# Altium PCB flowhw.PcbDoc (part 2 of 2)
Units mil, origin at the board's own origin, x right, y up, seen from the top; angles counter-clockwise.
Board outline 4650 x 1950 mil, 4 copper layers (Top Layer, Layer 1, Layer 2, Bottom Layer), stack 23.756 mil thick; 120 components, 77 nets, 417 pads, 937 vias.
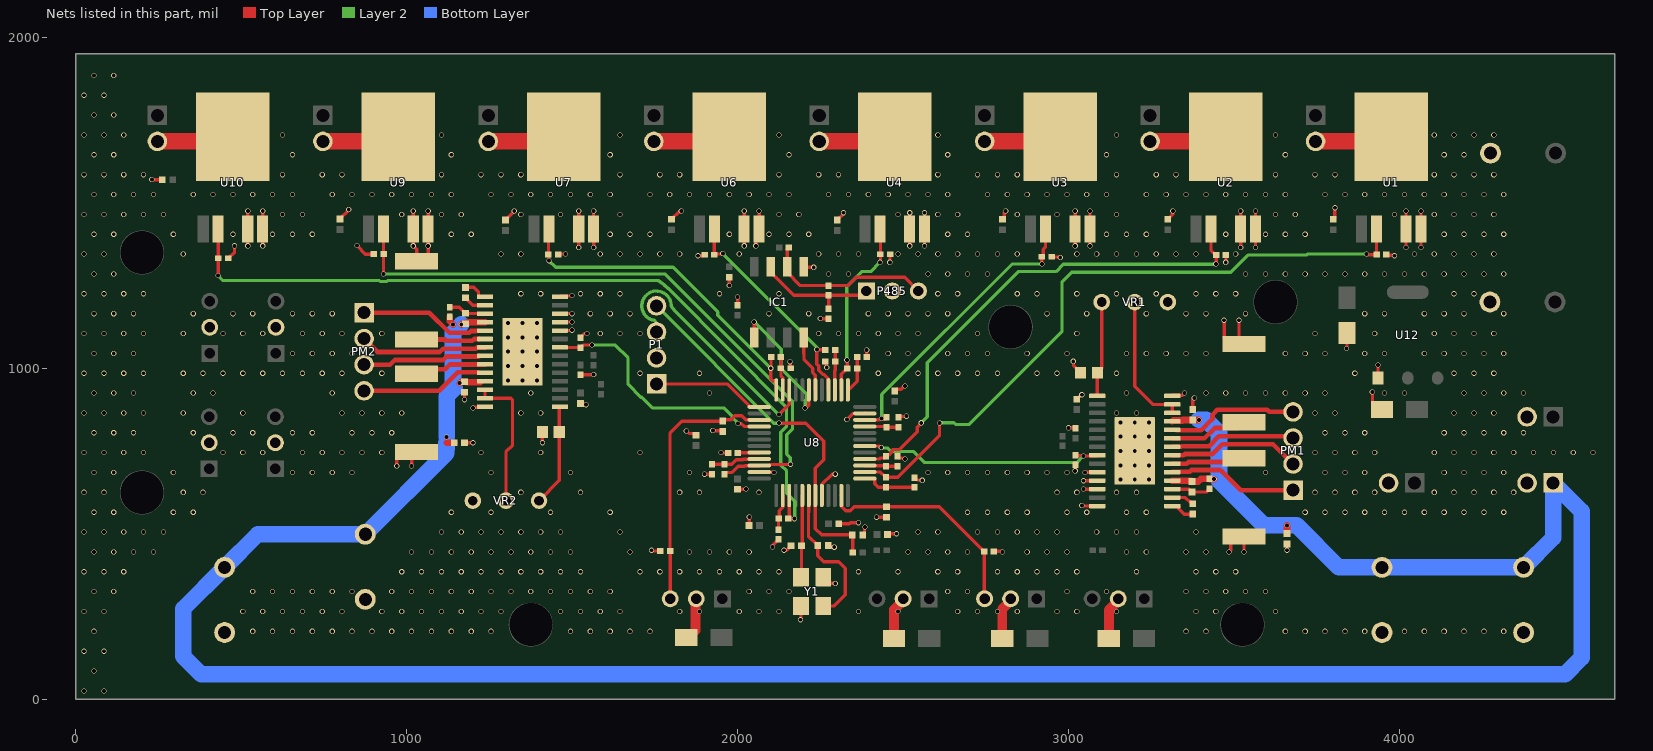
[diagram p4: the nets of this part, all layers, seen from the top]

## Via types
v1: diameter 15.75, hole 11.81, Top Layer to Bottom Layer, tented both sides, 907 vias
v2: diameter 19.68, hole 11.81, Top Layer to Bottom Layer, tented both sides, 30 vias

## Nets (pads, with @x,y where several pads share a name; then routed paths per layer and width w, separated by ;. In a path a pad name is that pad's centre, name@x,y a point inside that pad or via, vN(x,y) a via of type N, cw(c..) or ccw(c..) an arc to the next point about the centre after c; other vN are vias at no path point) (continued)
GND: 5V.2 12V.2 C1.1 C2.2 C3.2 C4.1 C5.1 C6.2 C7.1 C8.2 C9.2 C10.2 C12.1 C13.1 C15.2 C16.1 C17.1 C18.2 C19.2 C20.1 C21.2 C22.2 C23.1 C24.2 C25.2 C26.2 C27.1 C28.2 C29.2 C30.2 C31.1 C33.1 C35.2 C36.2 C37.2 C38.2 C39.1 C40.1 C41.1 C42.1 C43.1 C44.1 IC1.5 P1.2 P485.2 pad.2@403.35,775 pad.2@405,1123.74 pad.2@603.35,775 pad.2@605,1123.74 pad.2@1875,303.35 pad.2@2500,303.35 pad.2@2825,303.35 pad.2@3150,303.35 pad.14 pad.24 pad.25 pad.26 pad.28 pad.29 R1.1 R2.2 R5.1 R7.1 R8.2 R11.2 R14.2 R15.2 R17.1 R18.1 R19.2 R20.2 R22.2 R24.2 R25.2 R26.2 R27.2 R28.2 R29.2 R30.2 R31.2 R40.2 R41.2 R42.2 R43.2 R44.2 R45.2 R46.2 R47.2 U1.4 U1.5 U2.4 U2.5 U3.4 U3.5 U4.4 U4.5 U6.4 U6.5 U7.4 U7.5 U8.8 U8.23 U8.47 U9.4 U9.5 U10.4 U10.5 U12.1 VM.2 VR1.1 VR2.1 Y1.2 Y1.4 | length 5240.3
  Top Layer w10: v1(230,1570) 230.09,1569.91 C27.1@261.76,1569.91 ; R31.2@460.53,1332.39 461.51,1332.39 480,1350.88 v1(480,1370) ; v1(520,1370) 519.88,1370.12 U10.4@519.88,1420.47 519.88,1474.88 v1(520,1475) ; v1(565,1370) 564.76,1370.24 U10.5@564.76,1420.47 564.76,1474.76 v1(565,1475) ; C23.1@798.32,1451.02 825,1477.69 v1(825,1480) ; v1(850,1370.75) 850,1370 875.24,1344.76 R30.2@900.72,1344.76 ; v1(970,705) v1(970,705) 970.04,727.28 989.65,746.89 R22.2@1030,746.89 1015,731.89 v1(1015,705) ; v1(1020,1475) 1020,1420.59 U9.4@1019.88,1420.47 1020,1420.35 v1(1020,1370) 1030,1360 R19.2@1030,1323.11 1045.39,1323.11 1065,1342.72 v1(1065,1370) 1064.76,1370.24 U9.5@1064.76,1420.47 1065,1420.71 v1(1065,1475) ; C39.1@1174.6,927.68 1174.6,905.4 v1(1175,905) ; C40.1@1175,775 v1(1200,775) ; v1(1200,880) 1201.77,881.77 1234.92,881.77 pad.14@1236.81,883.66 ; C20.1@1298.3,1447.63 1325,1474.33 v1(1325,1475) ; C33.1@1409.93,807.08 1410,807.01 v1(1410,775) ; R29.2@1457.92,1343.21 1459.71,1345 v1(1480,1345) ; pad.24@1463.19,1113.98 1498.98,1113.98 v1(1500,1115) ; pad.25@1463.19,1139.57 1499.57,1139.57 v1(1500,1140) ; pad.26@1463.19,1165.16 1499.84,1165.16 v1(1500,1165) ; pad.28@1463.19,1216.34 1465.08,1218.23 1498.23,1218.23 v1(1500,1220) ; v1(1520,1365) 1520,1420.35 U7.4@1519.88,1420.47 1520,1420.59 v1(1520,1475) ; C29.2@1525,893.5 1527.4,891.1 1541.03,891.1 v1(1542.13,890) ; R18.1@1525,980.32 1562.26,980.32 1563.44,981.5 v1(1565,981.5) ; R17.1@1525,1091.73 1525,1092.72 1537.28,1105 v1(1545,1105) ; v1(1565,1365) 1565,1420.24 U7.5@1564.76,1420.47 1564.76,1474.76 v1(1565,1475) ; v1(1740,450) 1742.14,447.86 R14.2@1766.43,447.86 ; C12.1@1800,1450 1825,1475 v1(1830,1475) ; C22.2@1844.63,186.85 1852.5,186.85 C22.2@1873.09,207.44 ; v1(1845,810.32) 1846.56,810.32 1853.8,803.08 1868.79,803.08 C9.2@1874.03,797.84 ; pad.2@1873.09,301.44 pad.2@1875,303.35 ; v1(1880,1340) 1896.88,1340 R28.2@1899.98,1343.1 ; v1(1900,680) 1922.87,680 R46.2@1923.12,680.25 ; v1(1925.07,812.28) 1926.17,811.18 1953.07,811.18 C24.2@1955,809.25 ; v1(1950,745) 1950.8,744.2 1970.37,744.2 R20.2@1971.18,743.39 ; v1(1975,1250) C6.2@1975,1275 ; C43.1@2000,634.25 2024.25,634.25 v1(2025,635) ; R2.2@2000,1189.76 v1(2000,1215) ; v1(2020,1370) 2019.88,1370.12 U6.4@2019.88,1420.47 2020,1420.59 v1(2020,1475) ; C41.1@2034.25,525 2034.78,525.53 2034.78,549.78 v1(2035.32,550.32) ; v1(2055,1370) 2055,1410.71 2065,1420.71 v1(2065,1475) ; U8.47@2065.55,686.42 2065.9,686.07 2109.2,686.07 v1(2110.12,685.15) ; v1(2105,460) 2105,463.53 2123.11,481.64 R47.2@2123.11,482.62 ; v1(2140,450) 2147.92,450 C31.1@2161.57,463.65 ; v1(2158.36,1019.94) 2159.38,1018.93 2159.38,1000.85 R45.2@2160.39,999.83 ; v1(2190,240) 2191.54,241.54 Y1.4@2191.54,281.69 ; IC1.5@2200,1306.77 2201.77,1305 v1(2230,1305) ; v1(2250,1150) R1.1@2275,1150 ; U8.8@2254.53,615.55 2254.87,615.9 2254.87,649.65 2285.23,680 v1(2295,680) ; Y1.2@2258.46,368.31 2276.77,350 v1(2295,350) ; R44.2@2265.24,1020 2265.24,1019.15 2268.24,1016.14 2268.24,1003.48 v1(2269.34,1002.38) ; C30.2@2273.57,464.47 2277.59,460.45 2290.87,460.45 v1(2291.97,459.35) ; C7.1@2300.9,1448.07 2320,1467.16 v1(2320,1470) ; C42.1@2310.98,530 2337.85,530 2340.97,533.12 2365.31,533.12 v1(2365.64,533.45) ; v1(2330,845) 2348.24,863.24 2384.1,863.24 U8.23@2384.45,863.58 ; C28.2@2378.01,496.47 2383.24,501.7 2383.24,516.69 2385,518.44 v1(2385,520) ; v1(2390,1055) 2390.3,1054.7 2390.3,1034.71 R43.2@2390.6,1034.41 ; v1(2420,550) C26.2@2450,550 ; C21.2@2452.91,497.52 2455.4,500 v1(2480,500) ; v1(2460,1320) 2460.61,1320.61 2460.61,1343.92 R27.2@2461.23,1344.53 ; C44.1@2475,931.5 2480.24,936.73 2493.74,936.73 2503.79,946.78 v1(2505.35,946.78) ; R41.2@2483.65,733.72 2483.65,732.74 2487.51,728.88 2501.33,728.88 2504.41,725.8 v1(2505.96,725.8) ; R42.2@2485.8,851.47 2488.45,854.12 2508.93,854.12 v1(2510.03,855.22) ; v1(2520,1370) 2520,1385.12 2531.61,1385.12 2519.88,1396.85 U4.4@2519.88,1420.47 2520,1420.59 v1(2520,1470) ; R40.2@2535,669.76 2535,668.78 2538.86,664.92 2540.08,664.92 2542.64,662.36 2556.71,662.36 v1(2557.81,661.26) ; v1(2565,1370) 2564.76,1370.24 U4.5@2564.76,1420.47 2565,1420.71 v1(2565,1470) ; R15.2@2774.11,446.78 2798.22,446.78 v1(2800,445) ; C5.1@2800,1450 2805.24,1455.24 2805.24,1470.24 v1(2810,1475) ; R26.2@2948.58,1336.87 2949.52,1335.93 2974.07,1335.93 v1(2975,1335) ; v1(3000,820) 3018.81,820 R7.1@3020.82,817.99 ; v1(3014.11,1020.89) 3015.21,1019.79 3015.21,1007.77 3035.69,987.3 C13.1@3035.69,986.31 ; v1(3020,690) 3020,707.45 R5.1@3020.82,708.27 ; v1(3020,1370) 3019.88,1370.12 U3.4@3019.88,1420.47 3020,1420.59 v1(3020,1475) ; C8.2@3025,906.5 3038.5,920 v1(3040,920) ; v1(3040,585) 3041.34,583.66 pad.28@3086.81,583.66 ; v1(3045,635) 3045.16,634.84 pad.26@3086.81,634.84 ; v1(3045,660) 3045.43,660.43 pad.25@3086.81,660.43 ; v1(3050,685) 3050.51,685.51 3086.3,685.51 pad.24@3086.81,686.02 ; v1(3065,1370) 3065,1420.24 U3.5@3064.76,1420.47 3064.76,1474.76 v1(3065,1475) ; C4.1@3300,1450 3315,1465 v1(3315,1475) ; pad.14@3313.19,916.34 3315.08,918.23 3343.23,918.23 v1(3350,925) ; C16.1@3375,875 3375,905 v1(3380,910) ; v1(3470,1145) v1(3470,1145) 3470.04,1092.72 3489.65,1073.11 R11.2@3530,1073.11 3515,1088.11 v1(3515,1145) ; v1(3475,1320) 3475.45,1320.45 R25.2@3475.45,1341.75 ; v1(3485,445) 3490,450 3490,472.28 3509.61,491.89 R8.2@3530,491.89 v1(3530,445) ; v1(3520,1365) 3520,1420.35 U2.4@3519.88,1420.47 3520,1420.59 v1(3520,1475) ; v1(3565,1365) 3565,1420.24 U2.5@3564.76,1420.47 3564.76,1474.76 v1(3565,1475) ; v1(3660,450) C17.1@3660,469.25 ; C1.1@3800,1450 3803.9,1453.9 3803.9,1483.9 v1(3805,1485) ; v1(3840,1060) 3841.61,1061.61 C38.2@3841.61,1106.81 ; v1(3917.82,927.82) 3918.39,927.25 3918.39,895.59 3938.98,875 C37.2@3946.85,875 ; U12.1@3934.84,970.28 3934.84,1009.84 v1(3935,1010) ; R24.2@3960.22,1343.23 3962.35,1341.1 3983.9,1341.1 v1(3985,1340) ; v1(4020,1365) 4019.88,1365.12 U1.4@4019.88,1420.47 4019.88,1474.88 v1(4020,1475) ; v1(4065,1365) 4065,1420.24 U1.5@4064.76,1420.47 4064.76,1474.76 v1(4065,1475)
  Top Layer w30: C22.2@1873.09,207.44 pad.2@1873.09,301.44 ; C15.2@2472.82,183.64 2472.82,270.43 2500,297.61 pad.2@2500,303.35 ; C25.2@2799.64,182.83 2799.64,272.26 2825,297.61 pad.2@2825,303.35 ; C10.2@3121.62,182.77 3121.62,269.24 3150,297.61 pad.2@3150,303.35
  other v1: 25,25 85,25 55,85 25,145 85,145 55,205 535,205 595,205 655,205 715,205 775,205 835,205 895,205 955,205 1015,205 1075,205 1135,205 1195,205 1255,205 1495,205 1555,205 1615,205 1675,205 1735,205 3355,205 3415,205 3655,205 3715,205 3775,205 3835,205 3895,205 4015,205 4075,205 4135,205 4195,205 4255,205 4315,205 25,265 85,265 505,265 565,265 625,265 685,265 745,265 805,265 925,265 985,265 1045,265 1105,265 1165,265 1225,265 1285,265 1465,265 1525,265 1585,265 1645,265 1825,265 1885,265 2005,265 2065,265 2125,265 2365,265 2485,265 2665,265 2725,265 2785,265 2845,265 2965,265 3025,265 3145,265 3385,265 3445,265 3625,265 55,325 115,325 535,325 595,325 655,325 715,325 775,325 835,325 955,325 1015,325 1075,325 1135,325 1195,325 1255,325 1315,325 1375,325 1435,325 1495,325 1555,325 1615,325 2035,325 2095,325 2155,325 2635,325 2695,325 2995,325 3115,325 3355,325 3415,325 3475,325 3535,325 3595,325 25,385 85,385 145,385 985,385 1045,385 1105,385 1165,385 1225,385 1285,385 1345,385 1405,385 1465,385 1525,385 1705,385 1765,385 1825,385 1885,385 1945,385 2005,385 2065,385 2125,385 2365,385 2485,385 2605,385 2665,385 2785,385 2845,385 2905,385 2965,385 3025,385 3205,385 3385,385 3445,385 3505,385 55,445 115,445 175,445 235,445 1015,445 1075,445 1135,445 1195,445 1255,445 1315,445 1375,445 1435,445 1495,445 1675,445 1855,445 1915,445 1975,445 2035,445 2515,445 2575,445 2635,445 2695,445 2875,445 2935,445 2995,445 3175,445 3235,445 3355,445 3415,445 25,505 85,505 145,505 205,505 265,505 1105,505 1165,505 1225,505 1285,505 1345,505 1405,505 1465,505 1645,505 2545,505 2605,505 2725,505 2785,505 2845,505 2905,505 2965,505 3085,505 3145,505 3205,505 3385,505 55,565 115,565 295,565 355,565 1135,565 1255,565 1435,565 1615,565 2695,565 2755,565 2815,565 2875,565 2995,565 3055,565 3175,565 3235,565 3715,565 3775,565 3835,565 3895,565 3955,565 4015,565 4075,565 4135,565 4195,565 4255,565 4315,565 25,625 85,625 325,625 385,625 1345,625 1525,625 1825,625 1885,625 2065,625 2965,625 3025,625 3145,625 3205,625 3745,625 3805,625 3865,625 3925,625 4105,625 4165,625 4225,625 4285,625 4345,625 55,685 115,685 295,685 655,685 715,685 775,685 835,685 1255,685 1495,685 1855,685 2575,685 2635,685 2695,685 2755,685 2815,685 2875,685 2935,685 2995,685 3595,685 3775,685 3835,685 3895,685 4135,685 4195,685 4255,685 4315,685 25,745 85,745 145,745 205,745 445,745 505,745 565,745 685,745 745,745 805,745 865,745 925,745 1225,745 1405,745 1705,745 3745,745 3805,745 3865,745 3925,745 4105,745 4165,745 4225,745 4285,745 4345,745 4405,745 4465,745 4525,745 4585,745 55,805 115,805 175,805 355,805 475,805 535,805 655,805 715,805 835,805 895,805 955,805 3775,805 3835,805 3895,805 4135,805 4195,805 4255,805 4315,805 4375,805 25,865 85,865 145,865 205,865 325,865 505,865 805,865 865,865 925,865 985,865 1345,865 1405,865 3145,865 3205,865 3745,865 3805,865 4165,865 4225,865 4285,865 55,925 115,925 175,925 355,925 415,925 775,925 1375,925 1915,925 3175,925 3415,925 3475,925 3535,925 3595,925 3655,925 3715,925 3775,925 3955,925 4015,925 4195,925 4255,925 4315,925 4375,925 25,985 85,985 145,985 205,985 325,985 385,985 445,985 505,985 565,985 625,985 685,985 745,985 805,985 925,985 1705,985 1885,985 2425,985 2545,985 2605,985 2665,985 2725,985 2785,985 2905,985 2965,985 3145,985 3865,985 4165,985 4225,985 4285,985 55,1045 115,1045 175,1045 655,1045 715,1045 775,1045 835,1045 2455,1045 2515,1045 2635,1045 2695,1045 2755,1045 2875,1045 2995,1045 3175,1045 3235,1045 3295,1045 3355,1045 3415,1045 3655,1045 3715,1045 3775,1045 3895,1045 3955,1045 4075,1045 4135,1045 4195,1045 4255,1045 4315,1045 25,1105 85,1105 145,1105 205,1105 325,1105 445,1105 505,1105 565,1105 685,1105 745,1105 805,1105 925,1105 1585,1105 1645,1105 1705,1105 2245,1105 2305,1105 2365,1105 2425,1105 2485,1105 2545,1105 2725,1105 3025,1105 3745,1105 3925,1105 4105,1105 4165,1105 4225,1105 4285,1105 55,1165 115,1165 175,1165 355,1165 475,1165 535,1165 655,1165 715,1165 775,1165 1555,1165 1615,1165 1675,1165 2095,1165 2215,1165 2395,1165 2455,1165 2515,1165 2575,1165 2635,1165 2935,1165 3055,1165 3235,1165 3355,1165 3415,1165 3535,1165 3895,1165 3955,1165 4075,1165 4135,1165 4195,1165 4315,1165 25,1225 85,1225 145,1225 205,1225 1345,1225 1405,1225 1525,1225 1585,1225 1645,1225 1945,1225 2125,1225 2605,1225 2665,1225 2845,1225 2905,1225 3025,1225 3145,1225 3265,1225 3385,1225 3445,1225 3505,1225 4165,1225 4225,1225 55,1285 115,1285 2275,1285 2335,1285 2575,1285 2635,1285 2695,1285 2755,1285 3535,1285 3595,1285 3655,1285 3715,1285 3775,1285 3835,1285 3895,1285 3955,1285 4015,1285 4075,1285 4135,1285 4195,1285 4255,1285 4315,1285 25,1345 85,1345 325,1345 1285,1345 1345,1345 1585,1345 1645,1345 1705,1345 1765,1345 1825,1345 2005,1345 2245,1345 2305,1345 2365,1345 2485,1345 2545,1345 2605,1345 2665,1345 2725,1345 2785,1345 2845,1345 3025,1345 3085,1345 3145,1345 3205,1345 3265,1345 3325,1345 3385,1345 3505,1345 4045,1345 4105,1345 4165,1345 4225,1345 4285,1345 55,1405 115,1405 295,1405 475,1405 595,1405 655,1405 715,1405 1135,1405 1195,1405 1615,1405 1675,1405 1735,1405 1975,1405 2095,1405 2155,1405 2215,1405 2635,1405 2695,1405 3115,1405 3175,1405 3235,1405 3475,1405 3595,1405 3655,1405 3715,1405 4135,1405 4195,1405 4255,1405 4315,1405 25,1465 85,1465 145,1465 205,1465 265,1465 625,1465 685,1465 985,1465 1105,1465 1165,1465 1345,1465 1465,1465 1645,1465 2125,1465 2185,1465 2485,1465 2605,1465 2665,1465 2845,1465 2965,1465 3145,1465 3625,1465 3685,1465 3985,1465 4105,1465 4165,1465 4225,1465 4285,1465 55,1525 115,1525 175,1525 235,1525 355,1525 415,1525 475,1525 535,1525 595,1525 655,1525 775,1525 835,1525 895,1525 955,1525 1015,1525 1075,1525 1135,1525 1255,1525 1315,1525 1375,1525 1435,1525 1495,1525 1555,1525 1615,1525 1735,1525 1795,1525 1855,1525 1915,1525 1975,1525 2035,1525 2095,1525 2155,1525 2275,1525 2335,1525 2395,1525 2455,1525 2515,1525 2575,1525 2635,1525 2755,1525 2815,1525 2875,1525 2935,1525 2995,1525 3055,1525 3115,1525 3235,1525 3295,1525 3355,1525 3415,1525 3475,1525 3535,1525 3595,1525 3655,1525 3775,1525 3835,1525 3895,1525 3955,1525 4015,1525 4075,1525 4135,1525 4195,1525 4255,1525 4315,1525 25,1585 85,1585 145,1585 205,1585 625,1585 745,1585 805,1585 1105,1585 1225,1585 1285,1585 1345,1585 1645,1585 1765,1585 1825,1585 2125,1585 2245,1585 2305,1585 2605,1585 2725,1585 2785,1585 2845,1585 3145,1585 3265,1585 3325,1585 3625,1585 3745,1585 3805,1585 4105,1585 4165,1585 4225,1585 4285,1585 55,1645 115,1645 655,1645 1135,1645 1615,1645 2155,1645 2635,1645 3115,1645 3655,1645 4135,1645 4195,1645 25,1705 85,1705 145,1705 625,1705 1105,1705 1645,1705 2125,1705 2605,1705 3145,1705 3625,1705 4105,1705 4165,1705 4225,1705 4285,1705 55,1765 115,1765 25,1825 85,1825 55,1885 115,1885
  other v2: 3156.69,663.39 3200,663.39 3243.31,663.39 3156.69,706.69 3200,706.69 3243.31,706.69 3156.69,750 3200,750 3243.31,750 3156.69,793.31 3200,793.31 3243.31,793.31 3156.69,836.61 3200,836.61 3243.31,836.61 1306.69,963.39 1350,963.39 1393.31,963.39 1306.69,1006.69 1350,1006.69 1393.31,1006.69 1306.69,1050 1350,1050 1393.31,1050 1306.69,1093.31 1350,1093.31 1393.31,1093.31 1306.69,1136.61 1350,1136.61 1393.31,1136.61
LIM1: C24.1 pad.3@1796.26,303.35 R14.1 U8.39 | length 797.3
  Top Layer w10: pad.3@1796.26,303.35 1796.11,303.5 1796.11,447.7 R14.1@1795.95,447.86 1795.95,804.54 1830.86,839.45 1955,839.45 1960.24,844.7 1980.24,844.7 1991.62,856.08 2012.9,856.08 2024.74,844.24 2065.2,844.24 U8.39@2065.55,843.9
LIM2: C26.1 pad.3@2746.26,303.35 R15.1 U8.11 | length 675.1
  Top Layer w10: U8.11@2313.58,615.55 2313.93,615.2 2313.93,581.45 2326.27,569.12 2340.27,569.12 2352.65,581.5 C26.1@2450,581.5 2608.89,581.5 2743.6,446.78 R15.1@2744.58,446.78 2745.42,445.95 2745.42,304.19 pad.3@2746.26,303.35
NetC11_1: C11.1 pad.2@3313.19,609.25 | length 69.5
  Top Layer w10: pad.2@3313.19,609.25 3352.8,609.25 3366.06,595.98 3369.76,595.98 C11.1@3375,590.75
NetC11_2: C11.2 pad.1@3313.19,583.66 | length 75.7
  Top Layer w10: pad.1@3313.19,583.66 3330.91,583.66 3332.8,581.77 3332.8,575.37 3348.91,559.25 C11.2@3375,559.25
NetC13_2: C13.2 pad.15@3086.81,916.34 VR1.3 | length 289.1
  Top Layer w10: pad.15@3086.81,916.34 3086.81,986.26 C13.2@3086.87,986.31 3086.87,987.3 3100,1000.43 VR1.3@3100,1200
NetC14_2: C14.2 pad.3@3313.19,634.84 R12.2 | length 121
  Top Layer w10: pad.3@3313.19,634.84 3364.39,634.84 C14.2@3373.24,625.99 3416.49,625.99 3425.7,635.2 R12.2@3425.7,636.19
NetC30_1: C30.1 U8.6 Y1.1 | length 453.7
  Top Layer w10: U8.6@2215.16,615.55 2215.16,565.02 2214,563.86 2214,492.54 C30.1@2242.07,464.47 2242.07,432.93 2260,415 2305,415 2325,395 2325,315 2291.69,281.69 Y1.1@2258.46,281.69
NetC31_2: C31.2 U8.5 Y1.3 | length 248.9
  Top Layer w10: Y1.3@2191.54,368.31 2193.07,369.84 C31.2@2193.07,463.65 2195.13,465.71 2195.13,615.2 U8.5@2195.47,615.55
NetC32_1: C32.1 pad.2@1236.81,1190.75 | length 68.5
  Top Layer w10: C32.1@1177.45,1212.87 1199.58,1190.75 pad.2@1236.81,1190.75
NetC32_2: C32.2 pad.1@1236.81,1216.34 | length 77.8
  Top Layer w10: C32.2@1177.45,1244.37 1202.69,1244.37 1217.2,1229.85 1217.2,1218.23 1219.09,1216.34 pad.1@1236.81,1216.34
NetC33_2: C33.2 pad.15@1463.19,883.66 VR2.3 | length 309.9
  Top Layer w10: VR2.3@1400,600 1461.11,661.11 C33.2@1461.11,807.08 1461.11,881.77 1463,883.66 pad.15@1463.19,883.66
NetC34_2: C34.2 pad.3@1236.81,1165.16 R23.2 | length 114.9
  Top Layer w10: R23.2@1130,1184.76 1158.54,1184.76 C34.2@1177.44,1165.86 1177.79,1165.51 1236.46,1165.51 pad.3@1236.81,1165.16
NetIC1_6: IC1.6 P485.3 R3.2 R6.1 | length 518.5
  Top Layer w10: R6.1@2155.24,1365 2154.25,1365 2150,1360.75 IC1.6@2150,1306.77 2150,1289.55 2189.55,1250 R3.2@2275,1250 2333.08,1250 2358.08,1275 2504.79,1275 P485.3@2546.37,1233.42
NetIC1_7: IC1.7 P485.1 R1.2 R3.1 | length 381
  Top Layer w10: IC1.7@2100,1306.77 2100,1289.55 2169.07,1220.47 R3.1@2275,1220.47 ; R1.2@2275,1179.53 R3.1@2275,1220.47 ; P485.1@2388.89,1233.42 2375.95,1220.47 R3.1@2275,1220.47
NetP1_1: P1.1 U8.37 | length 339.2
  Top Layer w10: P1.1@1755,952.52 1968.32,952.52 2037.57,883.27 U8.37@2065.55,883.27
NetP1_3: P1.3 U8.34 | length 816.6
  Top Layer w10: v1(2125,860) 2155.76,890.76 2155.76,934.1 U8.34@2156.1,934.45
  Layer 2 w10: P1.3@1776.85,1093.15 1753.32,1116.68 1753.32,1139.62 1750.39,1142.55 1748.21,1144.73 cw(c1755,1188.74) 1752.72,1233.21 1753.6,1233.25 cw(c1754.12,1223.27) 1754.12,1233.27 1756.56,1233.27 cw(c1756.56,1223.27) 1757.46,1233.23 1759.01,1233.09 cw(c1755,1188.74) 1799.49,1190.46 ccw(c1809.48,1190.93) 1801.67,1184.68 cw(c1308.94,784.35) 1807.13,1177.87 1807.54,1177.46 v1(2125,860)
NetPM1_1: pad.5@3313.19,686.02 PM1.1 | length 392.5
  Top Layer w14: pad.5@3313.19,687.61 3366.56,687.61 3371.66,692.72 3457.44,692.72 3459.65,690.5 3461.24,690.5 3519.85,631.89 PM1.1@3678.35,631.89
NetPM1_2: pad.7@3313.19,737.2 PM1.2 | length 403.3
  Top Layer w14: pad.7@3313.19,737.2 3313.3,737.31 3348.37,737.31 3351.78,740.72 3434.65,740.72 3463.94,770 3617.69,770 3677.06,710.63 PM1.2@3678.35,710.63
NetPM1_3: pad.8@3313.19,762.8 PM1.3 | length 380
  Top Layer w14: pad.8@3313.19,762.8 3313.3,762.91 3340.02,762.91 3341.83,764.72 3424.71,764.72 3454,794 3673.72,794 PM1.3@3678.35,789.37
NetPM1_4: pad.10@3313.19,813.98 PM1.4 | length 389.4
  Top Layer w14: pad.10@3325,812.39 3325.33,812.72 3400.9,812.72 3435,846.82 3435,860 3449.5,874.5 3600.35,874.5 3606.73,868.11 PM1.4@3678.35,868.11
NetPM2_1: pad.5@1236.81,1113.98 PM2.1 | length 365.7
  Top Layer w14: PM2.1@871.65,1168.11 1068.71,1168.11 1129.46,1107.36 1188.63,1107.36 1192.39,1111.12 1193.07,1111.12 1194.51,1112.57 1210,1112.57
NetPM2_2: pad.7@1236.81,1062.8 PM2.2 | length 387.6
  Top Layer w14: PM2.2@871.65,1089.37 912.02,1049 1100.06,1049 1110.42,1059.36 1208.51,1059.36 1211.84,1062.69 1236.7,1062.69 pad.7@1236.81,1062.8
NetPM2_3: pad.8@1236.81,1037.2 PM2.3 | length 358.5
  Top Layer w14: PM2.3@871.65,1010.63 949.57,1010.63 963.94,1025 1110,1025 1120.36,1035.36 1217.47,1035.36 pad.8@1219.2,1037.09
NetPM2_4: pad.10@1236.81,986.02 PM2.4 | length 366.3
  Top Layer w14: PM2.4@871.65,931.89 1098.41,931.89 1153.88,987.36 pad.10@1215,987.36
NetR8_1: pad.6@3313.19,711.61 R8.1 | length 205.3
  Top Layer w14: pad.6@3313.19,711.61 3356.61,711.61 3361.72,716.72 R8.1@3516.39,716.72
NetR11_1: pad.9@3313.19,788.39 R11.1 | length 236.9
  Top Layer w14: pad.9@3313.19,788.39 3330.69,788.39 3330.8,788.5 3331.67,788.5 3331.89,788.72 3410.84,788.72 3441.41,819.28 3512.39,819.28 R11.1@3530,836.89
NetR19_1: pad.6@1236.81,1088.39 R19.1 | length 192.7
  Top Layer w14: R19.1@1030,1086.89 1115.99,1086.89 1119.51,1083.36 1198.57,1083.36 1202.33,1087.12 1203.01,1087.12 1204.16,1088.28 pad.6@1219.2,1088.28
NetR20_1: R20.1 U8.44 | length 65.7
  Top Layer w10: R20.1@2000.7,743.39 2002.44,745.13 2065.2,745.13 U8.44@2065.55,745.47
NetR22_1: pad.9@1236.81,1011.61 R22.1 | length 218.6
  Top Layer w14: R22.1@1030,983.11 1043.89,997 1115.94,997 1130.3,1011.36 1220.09,1011.36 1220.23,1011.5 1236.7,1011.5 pad.9@1236.81,1011.61
NetU1_3: U1.3 VSOL1.2 | length 234.3
  Top Layer w50: VSOL1.2@3746.65,1685.63 3960.63,1685.63 U1.3@3975,1700
NetU2_3: U2.3 VSOL2.2 | length 234.3
  Top Layer w50: VSOL2.2@3246.65,1685.63 3460.63,1685.63 U2.3@3475,1700
NetU3_3: U3.3 VSOL3.2 | length 234.3
  Top Layer w50: VSOL3.2@2746.65,1685.63 2960.63,1685.63 U3.3@2975,1700
NetU4_3: U4.3 VSOL4.2 | length 234.3
  Top Layer w50: VSOL4.2@2246.65,1685.63 2460.63,1685.63 U4.3@2475,1700
NetU5_12: pad.12@3313.19,865.16 pad.13@3313.19,890.75 VR1.2 | length 416.3
  Top Layer w10: VR1.2@3200,1200 3200,945 3254.25,890.75 pad.13@3313.19,890.75 pad.12@3313.19,865.16
NetU6_3: U6.3 VSOL5.2 | length 234.3
  Top Layer w50: VSOL5.2@1746.65,1685.63 1960.63,1685.63 U6.3@1975,1700
NetU7_3: U7.3 VSOL6.2 | length 234.3
  Top Layer w50: VSOL6.2@1246.65,1685.63 1460.63,1685.63 U7.3@1475,1700
NetU9_3: U9.3 VSOL7.2 | length 234.3
  Top Layer w50: VSOL7.2@746.65,1685.63 960.63,1685.63 U9.3@975,1700
NetU10_3: U10.3 VSOL8.2 | length 234.3
  Top Layer w50: VSOL8.2@246.65,1685.63 460.63,1685.63 U10.3@475,1700
NetU11_12: pad.12@1236.81,934.84 pad.13@1236.81,909.25 VR2.2 | length 422.9
  Top Layer w10: pad.12@1236.81,934.84 pad.13@1236.81,909.25 1314.14,909.25 1320,903.39 1320,767.1 1300,747.1 VR2.2@1300,600
RST: C28.1 P1.4 R21.1 U8.7 | length 1141
  Top Layer w10: v1(2125,834.25) 2205.75,834.25 2260,780 2260,722.86 2234.84,697.71 U8.7@2234.84,615.55 2234.84,515.16 2253.53,496.47 C28.1@2346.51,496.47 2347.46,495.52 2347.46,443.9 R21.1@2348.4,442.95
  Layer 2 w10: P1.4@1730,1188.74 P1.4@1742.5,1176.24 ; P1.4@1755,1188.74 2109.49,834.25 v1(2125,834.25)
RXD: IC1.1 U8.31 | length 435.4
  Top Layer w10: IC1.1@2050,1093.23 v1(2050,1140) ; v1(2203.62,880) 2204.72,881.1 2207.74,881.1 2215.16,888.51 U8.31@2215.16,934.45
  Layer 2 w10: v1(2050,1140) 2131.95,1058.05 2131.95,998.05 2208.49,921.51 2208.49,906.43 2204.72,902.66 2204.72,881.1 v1(2203.62,880)
STEP1: pad.22@3086.81,737.2 R5.2 U8.18 | length 757.7
  Top Layer w10: U8.18@2384.45,765.16 2384.8,764.81 2427.72,764.81 2432.35,760.18 v1(2433.91,760.18) ; R5.2@3020.82,737.8 3022.51,736.1 3043.9,736.1 v1(3045,735) 3063.11,735 3063.43,735.31 3084.92,735.31 pad.22@3086.81,737.2
  Layer 2 w10: v1(2433.91,760.18) 2435.01,759.08 2452.33,759.08 2462.73,748.67 2531.33,748.67 2565,715 3025,715 v1(3045,735)
STEP2: pad.22@1463.19,1062.8 R17.2 U8.40 | length 757.1
  Top Layer w10: pad.22@1463.19,1062.8 1463.48,1062.5 1524.7,1062.5 R17.2@1525,1062.2 1525,1063.19 1528.86,1067.05 1529.84,1067.05 1532.8,1070 v1(1560,1070) ; v1(2001.5,833.21) 2002.6,832.11 2011.42,832.11 2019.32,824.21 U8.40@2065.55,824.21
  Layer 2 w10: v1(1560,1070) 1630,1070 1668.82,1031.18 1668.82,951.18 1707.25,912.75 1710,912.75 1742.75,880 1958.21,880 1983.54,854.66 1983.54,851.17 v1(2001.5,833.21)
SW1: R24.1 R32.2 U1.2 U8.14 | length 2017.1
  Top Layer w10: U8.14@2384.45,686.42 2431.66,686.42 R32.2@2442.88,675.19 ; R32.2@2448.47,670.35 2484.06,670.35 2610,796.29 2610,834.38 v1(2610.57,834.95) ; v1(3900,1345) 3901.77,1343.23 R24.1@3930.69,1343.23 3930.69,1419.9 U1.2@3930.12,1420.47
  Layer 2 w10: v1(2610.57,834.95) 2653.81,834.95 2658.53,830.22 2700.22,830.22 2980,1110 2980,1260 3010,1290 3490,1290 3542.13,1342.13 3718.85,1342.13 3721.72,1345 v1(3900,1345)
SW1PD: R32.1 R40.1 U8.13 | length 170
  Top Layer w10: U8.13@2384.45,666.73 2413.49,666.73 2414.32,665.9 2414.32,651.1 2424.61,640.82 R32.1@2448.47,640.82 2448.63,640.66 R40.1@2535,640.66
SW2: R25.1 R33.2 U2.2 U8.16 | length 1525.8
  Top Layer w10: U8.16@2384.45,725.79 2429.61,725.79 2432.88,729.06 2444.61,729.06 2448.47,732.92 2448.47,734.38 2452.32,738.23 2457.93,738.23 2463.79,744.09 2463.79,748.12 2470.23,754.56 2489.56,754.56 2542.84,807.84 2542.84,821.38 2555,833.54 v1(2555,835.1) ; U2.2@3430.12,1420.47 3430.12,1356.57 3444.94,1341.75 R25.1@3445.92,1341.75 3445.92,1315.92 v1(3445,1315)
  Layer 2 w10: v1(2555,835.1) 2572.87,852.97 2572.87,1017.13 2847.87,1292.13 2962.13,1292.13 2983.9,1313.9 3443.9,1313.9 v1(3445,1315)
SW2PD: R33.1 R41.1 U8.15 | length 100.3
  Top Layer w10: U8.15@2384.45,706.1 2384.8,705.76 2446.57,705.76 R33.1@2448.47,703.86 2448.63,704.03 2483.49,704.03 R41.1@2483.65,704.19
SW3: R26.1 R35.1 U3.2 U8.22 | length 894.6
  Top Layer w10: U8.22@2384.45,843.9 2384.8,844.24 2429.22,844.24 2433.29,848.32 v1(2434.85,848.32) ; v1@2436.18,845 2443.95,845 2445.53,846.58 2446.52,846.58 2450.38,850.44 R35.1@2450.38,851.42 ; R26.1@2919.05,1336.87 2919.05,1315.95 v1(2920,1315) ; R26.1@2923.9,1340.73 2923.9,1358.9 2930.12,1365.12 U3.2@2930.12,1420.47
  Layer 2 w10: v1(2434.85,848.32) 2435.95,849.42 2435.95,920.95 2830,1315 v1(2920,1315)
SW3PD: R35.2 R42.1 U8.21 | length 102.3
  Top Layer w10: U8.21@2384.45,824.21 2448.06,824.21 R35.2@2450.38,821.89 R42.1@2485.8,821.94
SW4: R27.1 R36.1 U4.2 U8.26 | length 552.1
  Top Layer w10: U8.26@2313.58,934.45 2313.58,982.24 2330.92,999.57 2330.92,1024.08 v1(2330,1025) ; v1(2430,1320) 2431.7,1321.7 R27.1@2431.7,1344.53 2431.7,1418.89 U4.2@2430.12,1420.47
  Layer 2 w10: v1(2330,1025) 2330,1246.92 2375.14,1292.06 2402.06,1292.06 v1(2430,1320)
SW4PD: R36.2 R43.1 U8.25 | length 103.4
  Top Layer w10: 2340,940 2361.37,961.37 R36.2@2361.37,999.51 2361.22,999.65 2361.22,1034.26 R43.1@2361.07,1034.41
SW5: R28.1 R37.1 U6.2 U8.28 | length 677.6
  Top Layer w10: U6.2@1930.12,1420.47 1929.51,1419.86 R28.1@1929.51,1343.1 1931.9,1345.49 1954.3,1345.49 v1(1955.4,1346.59) ; R37.1@2265.24,1055 2264.5,1055.74 2240.13,1055.74 v1(2239.39,1056.47) 2239.39,1012.52 2244.98,1006.93 2244.98,994.39 2258.49,980.88 2261.53,980.88 2273.87,968.55 2273.87,934.8 U8.28@2274.21,934.45
  Layer 2 w10: v1(1955.4,1346.59) 2240,1061.99 v1@2240,1056.47
SW5PD: R37.2 R44.1 U8.27 | length 121
  Top Layer w10: U8.27@2293.58,934.45 2293.58,992.48 2294.76,993.66 R44.1@2294.76,1020 R37.2@2294.76,1055
SW6: R29.1 R39.2 U7.2 U8.36 | length 1019.9
  Top Layer w10: v1(1430,1325) 1430,1341.61 R29.1@1428.39,1343.21 1428.39,1418.75 U7.2@1430.12,1420.47 ; R39.2@2101.39,1033.64 2100.69,1032.94 2100.69,1000.69 v1(2100,1000) 2100,968.52 2105.86,962.67 2115.9,962.67 2116.73,961.83 U8.36@2116.73,934.45
  Layer 2 w10: v1(1430,1325) 1450,1305 1805,1305 1940,1170 1940,1160 v1(2100,1000)
SW6PD: R39.1 R45.1 U8.35 | length 101.5
  Top Layer w10: R39.1@2130.91,1033.64 2130.91,976.65 2136.07,971.5 2136.07,934.8 U8.35@2136.42,934.45
SW7: R30.1 R34.1 U8.46 U9.2 | length 1945.5
  Top Layer w10: v1(930,1285) 930.25,1285.25 930.25,1420.34 U9.2@930.12,1420.47 ; R34.1@1960,680.24 1960,681.22 1963.86,685.08 1983.3,685.08 2002.12,703.9 2020.93,703.9 2022.78,705.76 2065.2,705.76 U8.46@2065.55,706.1 2095.57,706.1 2098.37,708.9 2158.9,708.9 v1(2160,710)
  Layer 2 w10: v1(930,1285) 1780,1285 2165.87,899.13 2165.87,817.32 2148.25,799.7 2148.25,740.61 2158.9,729.97 2158.9,711.1 v1(2160,710)
SW7PD: R34.2 R46.1 U8.45 | length 149.1
  Top Layer w10: R46.1@1923.12,709.78 R34.2@1960,709.76 1982.53,709.76 1996.3,723.53 2015.1,723.53 2017.01,725.44 2065.2,725.44 U8.45@2065.55,725.79
SW8: R31.1 R38.2 U8.3 U10.2 | length 2475
  Top Layer w10: v1(430,1280) 431,1281 R31.1@431,1332.39 431,1419.59 U10.2@430.12,1420.47 ; U8.3@2156.1,615.55 2156.1,548.77 R38.2@2153.55,546.22 2154.28,545.5 v1(2172.25,545.5)
  Layer 2 w10: v1(430,1280) 445,1265 917.65,1265 920.53,1262.13 939.47,1262.13 942.35,1265 1760,1265 1778.71,1251.61 1796.95,1235.11 cw(c1755,1188.74) 1799.42,1232.75 cw(c1387.13,820.88) 1800.72,1231.44 2143.74,885.89 2147.87,877.13 2147.87,824.78 2130.25,807.16 2130.25,707.4 2147.87,689.78 2147.87,622.13 2172.25,597.75 v1(2172.25,545.5)
SW8PD: R38.1 R47.1 U8.2 | length 108.9
  Top Layer w10: R47.1@2123.11,512.15 2123.57,512.61 2123.57,545.77 2126.25,548.44 2126.25,570.08 2136.07,579.91 2136.07,615.2 U8.2@2136.42,615.55
TXD: IC1.4 U8.30 | length 173.2
  Top Layer w10: IC1.4@2200,1093.23 2200,1043.33 2200.87,1042.46 2200.87,1025.59 2226.98,999.47 2226.98,986.93 2234.5,979.42 2234.5,934.8 U8.30@2234.84,934.45
VMOT: C14.1 C16.2 C17.2 C18.1 C19.1 C34.1 C35.1 C36.1 C39.2 C40.2 pad.4 pad.11 R12.1 R23.1 VM.1 | length 8316.6
  Top Layer w10: 1120.28,775.28 1120.28,792.35 v1(1120.56,792.63) ; v1(1140,1132.36) v1@1141,1133.36
  Top Layer w20: 1120.56,775 C40.2@1143.5,775 ; R23.1@1130,1155.24 1130,1142.36 v1(1140,1132.36) ; v1(1159.94,955.24) 1163.64,958.94 1174.36,958.94 C39.2@1174.6,959.18 1174.83,958.94 1181.16,958.94 1182.37,957.73 pad.11@1222.2,957.73 ; v1(1165,1132.36) 1166.76,1134.12 1177.21,1134.12 1182.65,1139.57 pad.4@1236.81,1139.57 ; pad.4@3313.19,660.43 3370.29,660.43 C14.1@3373.24,657.49 3373.48,657.72 3392.1,657.72 3400.09,665.72 R12.1@3425.7,665.72 3426.42,665 v1(3440,665) ; pad.11@3313.19,839.57 3315.89,842.27 3343.25,842.27 3344.49,843.5 C16.2@3375,843.5 3375.24,843.74 v1(3393.74,843.74) ; C17.2@3660,500.75 v1(3660,525)
  Bottom Layer w50: C36.1@450,398.43 325,273.43 325,129.29 379.29,75 4500,75 4550,125 4550,567.72 VM.1@4464.37,653.35 4464.37,487.8 C19.1@4375,398.43 ; C36.1@450,398.43 550,498.43 C35.1@875,498.43 ; C35.1@875,498.43 1120,743.43 ; 1120.28,757.19 1120.28,774.72 ; v1(1120.56,792.63) 1120.56,915.85 1144.85,940.15 ; 1140,955.3 1140,1107.36 v1(1165,1132.36) ; v1(3393.74,843.74) 3415.74,843.74 3454.58,804.9 3454.58,661.18 3590.76,525 v1(3660,525) 3690,525 3816.57,398.43 C18.1@3947.19,398.43 C19.1@4375,398.43
pads on no net: U8.4

## Polygon pours and split planes (outlines as drawn)
GND on Bottom Layer "GND_L04_P004" (solid, remove dead copper, pour order 4): 0,0 0,1950 4650,1950 4650,0
12V on Bottom Layer "12V_L04_P003" (solid, remove dead copper, pour order 3): 4430,780 4655,780 4655,1955 4650,1950 135,1950 135,1745 125,1735 130,1730 4305,1730 4355,1680 4355,980 4430,905
VMOT on Bottom Layer "VMOT_L04_P002" (solid, remove dead copper, pour order 2): 4430,695 4530,695 4520,685 4520,280 3705,280 3670,280 3360,585 3350,585 3350,880 3365,895 3535,895 3535,675 3670,540 4355,540 4430,615
VMOT on Bottom Layer "VMOT_L04_P001" (solid, remove dead copper, pour order 1): 4430,695 4435,690 4655,690 4655,10 4645,0 105,0 105,270 460,625 835,625 1035,825 1035,1175 1050,1175 1085,1210 1095,1200 1185,1200 1185,665 880,360 515,360 402.5,247.5 402.5,187.5 402.5,169.1 445,145 475,130 490,130 4430,130
GND on Layer 1 "GND_L02_P000" (solid, remove dead copper, pour order 0): 0,0 0,1950 4650,1950 4650,0

## Silkscreen, mask and mechanical layers (free items; w line width, h text height)
Top Overlay:
  circle w23.62: c3233.46,596.46 r11.81
  circle w9.84: c3313.19,555.12 r4.92
  circle w9.84: c1236.81,1244.88 r4.92
  circle w23.62: c1316.54,1203.54 r11.81
  lines w7.87: 1277.17,857.09 1422.83,857.09 ; 1277.17,1242.91 1422.83,1242.91 ; 3127.17,557.09 3272.83,557.09 ; 3127.17,942.91 3272.83,942.91 ; 336.42,619.49 336.42,930.51 513.58,930.51 513.58,619.49 336.42,619.49 ; 338.07,968.23 338.07,1279.25 515.24,1279.25 515.24,968.23 338.07,968.23 ; 536.42,619.49 536.42,930.51 713.58,930.51 713.58,619.49 536.42,619.49 ; 538.07,968.23 538.07,1279.25 715.24,1279.25 715.24,968.23 538.07,968.23 ; 1719.49,236.42 2030.51,236.42 2030.51,413.58 1719.49,413.58 1719.49,236.42 ; 2344.49,236.42 2344.49,413.58 2655.51,413.58 2655.51,236.42 2344.49,236.42 ; 2669.49,236.42 2980.51,236.42 2980.51,413.58 2669.49,413.58 2669.49,236.42 ; 2994.49,236.42 3305.51,236.42 3305.51,413.58 2994.49,413.58 2994.49,236.42
Mechanical 1:
  lines w6: -3,0 ccw(c0,0) 0,-3 ; -3,0 ccw(c0,0) 0,-3 ; -3,0 -3,1950 ; -3,1950 cw(c0,1950) 0,1953 ; -3,1950 cw(c0,1950) 0,1953 ; 0,-3 4650,-3 ; 0,1953 4650,1953 ; 4650,-3 ccw(c4650,0) 4653,0 ; 4650,-3 ccw(c4650,0) 4653,0 ; 4650,1953 cw(c4650,1950) 4653,1950 ; 4650,1953 cw(c4650,1950) 4653,1950 ; 4653,0 4653,1950
  text ".Designator" at 1290,1030 h40
  text ".Designator" at 3260,770 h40 r180
Mechanical 13:
  circle w3.94: c3253.15,592.52 r19.68
  circle w3.94: c1296.85,1207.48 r19.68
  lines w3.94: 336.42,743.5 360.04,743.5 360.04,645.08 497.83,645.08 497.83,904.92 360.04,904.92 360.04,806.5 336.42,806.5 ; 338.07,1092.24 361.69,1092.24 361.69,993.82 499.49,993.82 499.49,1253.66 361.69,1253.66 361.69,1155.24 338.07,1155.24 ; 393.5,619.49 393.5,645.08 ; 393.5,904.92 393.5,930.51 ; 395.16,968.23 395.16,993.82 ; 395.16,1253.66 395.16,1279.25 ; 425,619.49 425,645.08 ; 425,904.92 425,930.51 ; 426.65,968.23 426.65,993.82 ; 426.65,1253.66 426.65,1279.25 ; 536.42,743.5 560.04,743.5 560.04,645.08 697.83,645.08 697.83,904.92 560.04,904.92 560.04,806.5 536.42,806.5 ; 538.07,1092.24 561.69,1092.24 561.69,993.82 699.49,993.82 699.49,1253.66 561.69,1253.66 561.69,1155.24 538.07,1155.24 ; 593.5,619.49 593.5,645.08 ; 593.5,904.92 593.5,930.51 ; 595.16,968.23 595.16,993.82 ; 595.16,1253.66 595.16,1279.25 ; 625,619.49 625,645.08 ; 625,904.92 625,930.51 ; 626.65,968.23 626.65,993.82 ; 626.65,1253.66 626.65,1279.25 ; 1719.49,293.5 1745.08,293.5 ; 1719.49,325 1745.08,325 ; 1843.5,236.42 1843.5,260.04 1745.08,260.04 1745.08,397.83 2004.92,397.83 2004.92,260.04 1906.5,260.04 1906.5,236.42 ; 2004.92,293.5 2030.51,293.5 ; 2004.92,325 2030.51,325 ; 2344.49,293.5 2370.08,293.5 ; 2344.49,325 2370.08,325 ; 2468.5,236.42 2468.5,260.04 2370.08,260.04 2370.08,397.83 2629.92,397.83 2629.92,260.04 2531.5,260.04 2531.5,236.42 ; 2629.92,293.5 2655.51,293.5 ; 2629.92,325 2655.51,325 ; 2669.49,293.5 2695.08,293.5 ; 2669.49,325 2695.08,325 ; 2793.5,236.42 2793.5,260.04 2695.08,260.04 2695.08,397.83 2954.92,397.83 2954.92,260.04 2856.5,260.04 2856.5,236.42 ; 2954.92,293.5 2980.51,293.5 ; 2954.92,325 2980.51,325 ; 2994.49,293.5 3020.08,293.5 ; 2994.49,325 3020.08,325 ; 3118.5,236.42 3118.5,260.04 3020.08,260.04 3020.08,397.83 3279.92,397.83 3279.92,260.04 3181.5,260.04 3181.5,236.42 ; 3279.92,293.5 3305.51,293.5 ; 3279.92,325 3305.51,325 ; 336.42,619.49 336.42,930.51 513.58,930.51 513.58,619.49 336.42,619.49 ; 338.07,968.23 338.07,1279.25 515.24,1279.25 515.24,968.23 338.07,968.23 ; 536.42,619.49 536.42,930.51 713.58,930.51 713.58,619.49 536.42,619.49 ; 538.07,968.23 538.07,1279.25 715.24,1279.25 715.24,968.23 538.07,968.23 ; 1261.42,857.09 1261.42,1242.91 1438.58,1242.91 1438.58,857.09 1261.42,857.09 ; 1719.49,236.42 2030.51,236.42 2030.51,413.58 1719.49,413.58 1719.49,236.42 ; 2344.49,236.42 2344.49,413.58 2655.51,413.58 2655.51,236.42 2344.49,236.42 ; 2669.49,236.42 2980.51,236.42 2980.51,413.58 2669.49,413.58 2669.49,236.42 ; 2994.49,236.42 3305.51,236.42 3305.51,413.58 2994.49,413.58 2994.49,236.42 ; 3111.42,557.09 3288.58,557.09 3288.58,942.91 3111.42,942.91 3111.42,557.09
Mechanical 15:
  lines w1.97: 332.48,615.55 517.52,615.55 517.52,934.45 332.48,934.45 332.48,615.55 ; 334.13,964.29 519.17,964.29 519.17,1283.19 334.13,1283.19 334.13,964.29 ; 532.48,615.55 717.52,615.55 717.52,934.45 532.48,934.45 532.48,615.55 ; 534.13,964.29 719.17,964.29 719.17,1283.19 534.13,1283.19 534.13,964.29 ; 1208.27,853.15 1208.27,1246.85 1491.73,1246.85 1491.73,853.15 1208.27,853.15 ; 1715.55,232.48 1715.55,417.52 2034.45,417.52 2034.45,232.48 1715.55,232.48 ; 2340.55,232.48 2659.45,232.48 2659.45,417.52 2340.55,417.52 2340.55,232.48 ; 2665.55,232.48 2665.55,417.52 2984.45,417.52 2984.45,232.48 2665.55,232.48 ; 2990.55,232.48 2990.55,417.52 3309.45,417.52 3309.45,232.48 2990.55,232.48 ; 3058.27,553.15 3341.73,553.15 3341.73,946.85 3058.27,946.85 3058.27,553.15
  lines w3.94: 405.32,775 444.68,775 ; 406.97,1123.74 446.34,1123.74 ; 425,755.32 425,794.68 ; 426.65,1104.06 426.65,1143.43 ; 605.32,775 644.68,775 ; 606.97,1123.74 646.34,1123.74 ; 625,755.32 625,794.68 ; 626.65,1104.06 626.65,1143.43 ; 1330.31,1050 1369.68,1050 ; 1350,1030.32 1350,1069.69 ; 1855.32,325 1894.68,325 ; 1875,305.32 1875,344.68 ; 2480.31,325 2519.69,325 ; 2500,305.32 2500,344.68 ; 2805.31,325 2844.69,325 ; 2825,305.32 2825,344.68 ; 3130.31,325 3169.69,325 ; 3150,305.32 3150,344.68 ; 3180.31,750 3219.69,750 ; 3200,730.31 3200,769.68